# Altium PCB URESP_PULSER2.PcbDoc
Units mil, origin at the board's own origin, x right, y up, seen from the top; angles counter-clockwise.
Board outline 4803.15 x 2283.46 mil, 4 copper layers (Top Layer, GND, POWER, Bottom Layer), stack 23.756 mil thick; 37 components, 55 nets, 205 pads, 11 vias.
Unrouted connection lines stored in the file: 107.
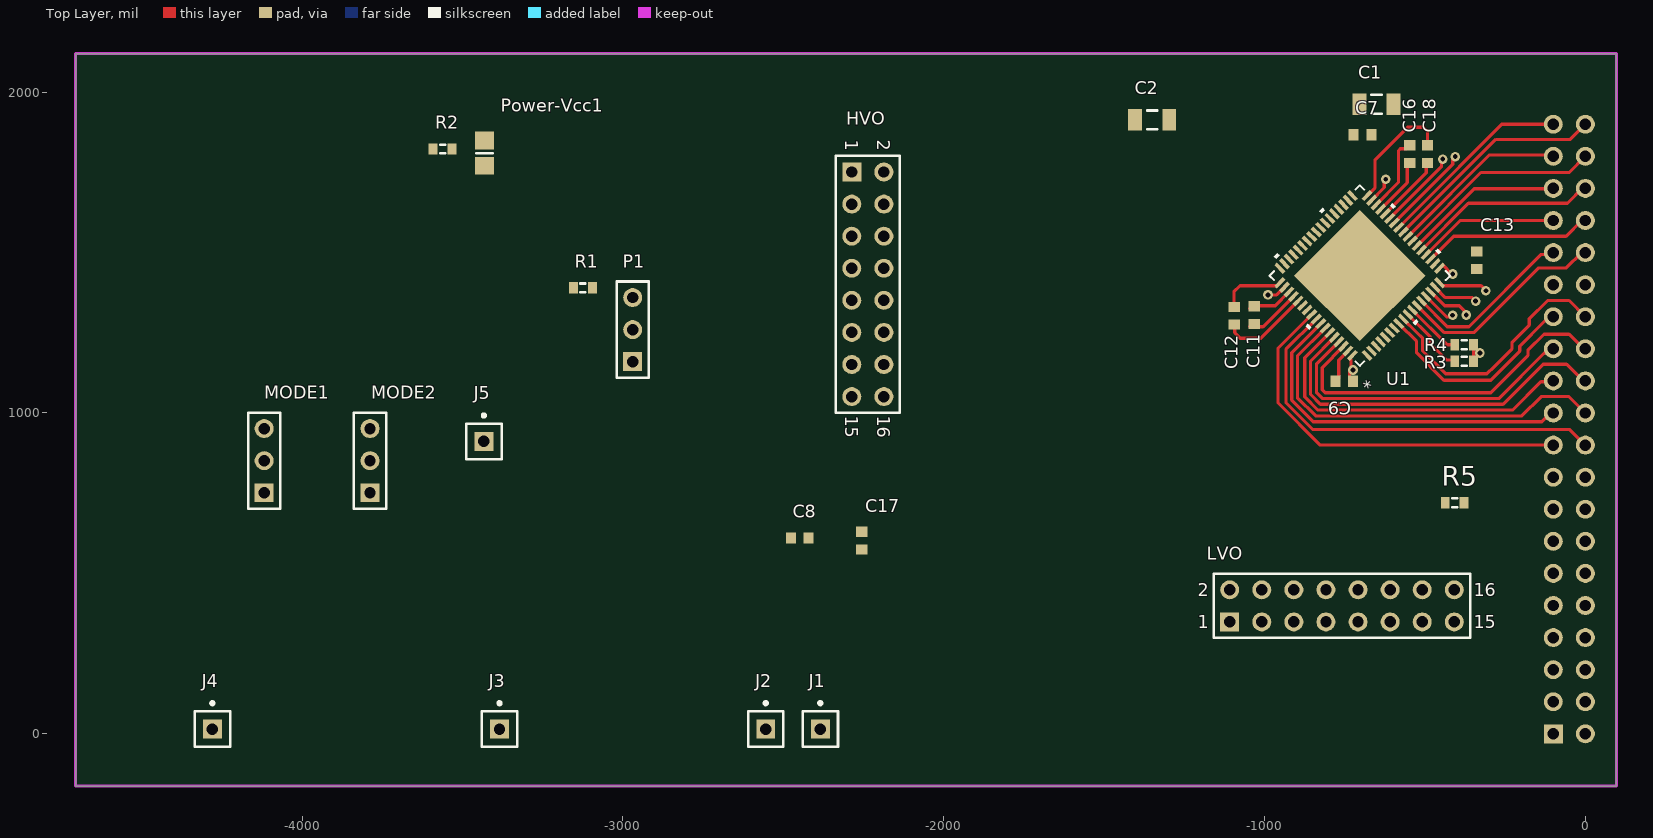
[diagram p0: Top Layer view]
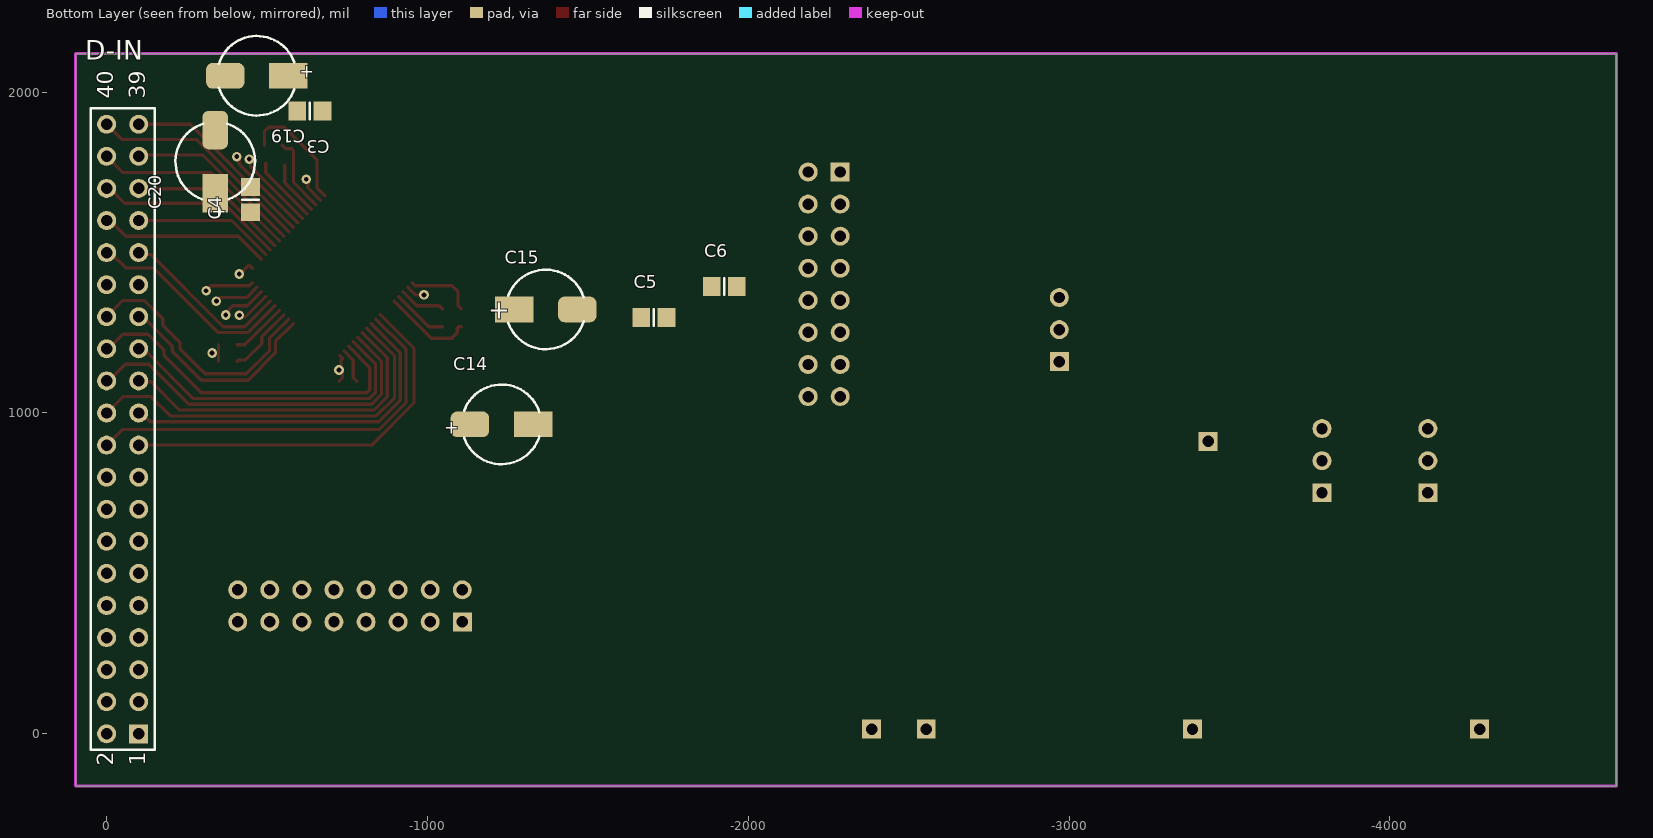
[diagram p1: Bottom Layer view, seen from below]

## Layer stack, top to bottom
Top Solder: solder mask 0.4, Solder Resist, Dk 3.5
Top Layer: signal copper 1.4
Dielectric 2: prepreg 2.8, PP-006, Dk 4.1
GND: signal copper 1.378
Dielectric 1: dielectric 12.6, FR-4, Dk 4.8
POWER: signal copper 1.378
Dielectric 3: prepreg 2.8, PP-006, Dk 4.1
Bottom Layer: signal copper 1.4
Bottom Solder: solder mask 0.4, Solder Resist, Dk 3.5

## Board outline
-4706.3,-162.99 96.85,-162.99 96.85,2120.47 -4706.3,2120.47

## Design rules (kind name [scope] priority, off if disabled: settings)
Clearance [All] p1: gap=10 ignorepadtopadclearanceinfootprint=FALSE except(0: Arc-Hole Track-Hole SMDPad-Hole THPad-Hole Via-Hole Fill-Hole Poly-Hole Region-Hole Text-Hole; 8: Arc-Arc Arc-Track Arc-SMDPad Arc-THPad Arc-Via Arc-Text Track-Track Track-SMDPad Track-THPad Track-Via Track-Text SMDPad-SMDPad SMDPad-THPad SMDPad-Text THPad-Text Via-Text Fill-Text Poly-Text Region-Text Text-Text)
PolygonConnect [All] p1: connectstyle=Relief reliefconductorwidth=10 reliefentries=4 polygonreliefangle="90 Angle" airgapwidth=10
RoutingVias [All] p1: holewidth=28 width=50 viastyle="Through Hole" minholewidth=28 minwidth=50 maxholewidth=28 maxwidth=50
SolderMaskExpansion [All] p1: expansion=4 istentingtop=FALSE
Width [All] p1: maxlimit=10 minlimit=10 preferedwidth=10
30 further rules are at their usual default settings.

## Components (designator, comment, footprint, x,y, rotation, side; value= is the part's Value field where it differs from the comment)
C1 "" C1206 -651.18,1962.99 r0 top value=10uF
C2 "" C1206 -1350.39,1913.39 r0 top value=10uF
C3 "" 6-0805_M -633.86,1940.94 r0 bottom value=100nF
C4 "" 6-0805_M -448.82,1665.35 r90 bottom value=100nF
C5 "" 6-0805_M -1705.71,1297.24 r180 bottom value=100nF
C6 "" 6-0805_M -1925.2,1393.7 r180 bottom value=100nF
C7 "" 1608[0603] -694.88,1867.13 r0 top value=100nF
C8 "" 1608[0603] -2448.82,610.24 r0 top value=100nF
C9 "" 1608[0603] -751.97,1098.43 r180 top value=100nF
C11 "" 1608[0603] -1032.48,1305.12 r270 top value=1uF-10V
C12 "" 1608[0603] -1094.49,1303.15 r270 top value=1uF-10V
C13 "" 1608[0603] -338.58,1476.38 r90 top value=100nF
C14 "" CAPPR5-6.3X5#1 -1230.96,964.57 r180 bottom value=10uF
C15 "" CAPPR5-6.3x5 -1368.76,1322.83 r180 bottom value=10uF
C16 "" 1608[0603] -547.24,1807.09 r270 top value=1uF-10V
C17 "" 1608[0603] -2255.91,602.36 r90 top value=1uF
C18 "" 1608[0603] -492.13,1807.09 r270 top value=1uF-10V
C19 "" CAPPR5-6.3X5#2 -468.5,2051.18 r0 bottom value=10uF
C20 "" CAPPR5-6.3X5#2 -338.58,1783.46 r90 bottom value=10uF
D-IN "" HDR2X20 -100,0 r90 bottom
HVO "" HDR2X8 -2286.61,1751.18 r270 top
J1 "" PIN1 -2384.8,14.76 r0 top
J2 "" PIN1 -2554.8,14.76 r0 top
J3 "" PIN1 -3384.8,14.76 r0 top
J4 "" PIN1 -4279.8,14.76 r0 top
J5 "" PIN1 -3433.39,911.42 r0 top
LVO "" HDR2X8 -1108.66,348.82 r0 top
MODE1 "" HDR1X3 -4118.39,751.42 r90 top
MODE2 "" HDR1X3 -3788.39,751.42 r90 top
P1 "SYNC" HDR1X3 -2969.72,1159.88 r90 top
Power-Vcc1 "LED3" 6-0805_M -3432.09,1810.04 r90 top
R1 "" J1-0603 -3124.72,1389.88 r0 top value=1K
R2 "" J1-0603 -3562.01,1822.83 r0 top value=1K
R3 "" J1-0603 -377.95,1161.42 r180 top value=1K
R4 "" J1-0603 -377.95,1212.6 r180 top value=1K
R5 "" J1-0603 -407.48,720.47 r0 top value=1K
U1 "MAX14808ETK+T" 21-0142E_T6800-2 -703.23,1428.55 r135 top value=Value

## Footprints (in the part's own frame and the unit in brackets; to place one, negate y for a bottom-side part, rotate by r counter-clockwise, add the part's x,y. Pads: shape width x height; smd on the part's side, far side on the other; paste and mask are expansions set on the pad)
6-0805_M [mm] "Chip Resistor, Body 2.0x1.2mm, IPC Low Density"
  rect 1.4x1.5 smd: 1(-1,0) 2(1,0)
  silkscreen extent 0,-0.65 0,0.65, body extent -1.07,-0.7 1.07,0.7, height 0.7
21-0142E_T6800-2 [mil]
  rect 38x12 smd: 1(-192,160) 2(-192,140) 3(-192,120) 4(-192,100) 5(-192,80) 6(-192,60) 7(-192,40) 8(-192,20) 9(-192,0) 10(-192,-20) 11(-192,-40) 12(-192,-60) 13(-192,-80) 14(-192,-100) 15(-192,-120) 16(-192,-140) 17(-192,-160) 35(192,-160) 36(192,-140) 37(192,-120) 38(192,-100) 39(192,-80) 40(192,-60) 41(192,-40) 42(192,-20) 43(192,0) 44(192,20) 45(192,40) 46(192,60) 47(192,80) 48(192,100) 49(192,120) 50(192,140) 51(192,160)
  rect 12x38 smd: 18(-160,-192) 19(-140,-192) 20(-120,-192) 21(-100,-192) 22(-80,-192) 23(-60,-192) 24(-40,-192) 25(-20,-192) 26(0,-192) 27(20,-192) 28(40,-192) 29(60,-192) 30(80,-192) 31(100,-192) 32(120,-192) 33(140,-192) 34(160,-192) 52(160,192) 53(140,192) 54(120,192) 55(100,192) 56(80,192) 57(60,192) 58(40,192) 59(20,192) 60(0,192) 61(-20,192) 62(-40,192) 63(-60,192) 64(-80,192) 65(-100,192) 66(-120,192) 67(-140,192) 68(-160,192)
  rect 290x290 smd paste-153: 69(0,0)
  silkscreen extent -231,-231 231,231
1608[0603] [mm] "Chip Capacitor, Body 1.6x0.8mm, IPC High Density"
  rect 0.8x0.9 smd: 1(-0.7,0) 2(0.7,0)
  body extent -0.87,-0.48 0.87,0.48, height 1.3
C1206 [mm] "Chip Capacitor, Body 3.2x1.6mm, IPC High Density"
  rect 1.1x1.7 smd: 1(-1.35,0) 2(1.35,0)
  silkscreen extent -0.4,-0.75 0.4,0.75, body extent -1.7,-0.9 1.7,0.9, height 1.3
CAPPR5-6.3X5#1 [mil] "Capacitor, Electrolytic, Radial; Body 6.3 x 5 mm (Dia.xH typ); Pin Spacing 5 mm (typ)"
  rrect50% 120x80 smd: 1(-98.43,0)
  rect 120x80 smd: 2(98.43,0)
  silkscreen extent -117,-124 118,124
CAPPR5-6.3X5#2 [mil] "Capacitor, Electrolytic, Radial; Body 6.3 x 5 mm (Dia.xH typ); Pin Spacing 5 mm (typ)"
  rect 120x80 smd: 1(-98.43,0)
  rrect50% 120x80 smd: 2(98.43,0)
  silkscreen extent -117,-124 118,124
CAPPR5-6.3x5 [mil] "Capacitor, Electrolytic, Radial; Body 6.3 x 5 mm (Dia.xH typ); Pin Spacing 5 mm (typ)"
  rect 120x80 smd: 1(-98.43,0)
  rrect50% 120x80 smd: 2(98.43,0)
  silkscreen extent -117,-124 118,124
HDR1X3 [mm] "Connector; Header; 3 Position"
  rect 1.5x1.5 hole 0.9: 1(0,0)
  round 1.5 hole 0.9: 2(2.54,0) 3(5.08,0)
  silkscreen extent -1.27,-1.27 6.35,1.27
HDR2X8 [mm] "Connector; Header; 8x2 Position"
  rect 1.5x1.5 hole 0.9: 1(0,0)
  round 1.5 hole 0.9: 2(0,2.54) 3(2.54,0) 4(2.54,2.54) 5(5.08,0) 6(5.08,2.54) 7(7.62,0) 8(7.62,2.54) 9(10.16,0) 10(10.16,2.54) 11(12.7,0) 12(12.7,2.54) 13(15.24,0) 14(15.24,2.54) 15(17.78,0) 16(17.78,2.54)
  silkscreen extent -1.27,-1.27 19.05,3.81
HDR2X20 [mm] "Connector; Header; 20x2 Position"
  rect 1.5x1.5 hole 0.9: 1(0,0)
  round 1.5 hole 0.9: 2(0,2.54) 3(2.54,0) 4(2.54,2.54) 5(5.08,0) 6(5.08,2.54) 7(7.62,0) 8(7.62,2.54) 9(10.16,0) 10(10.16,2.54) 11(12.7,0) 12(12.7,2.54) 13(15.24,0) 14(15.24,2.54) 15(17.78,0) 16(17.78,2.54) 17(20.32,0) 18(20.32,2.54) 19(22.86,0) 20(22.86,2.54) 21(25.4,0) 22(25.4,2.54) 23(27.94,0) 24(27.94,2.54) 25(30.48,0) 26(30.48,2.54) 27(33.02,0) 28(33.02,2.54) 29(35.56,0) 30(35.56,2.54) 31(38.1,0) 32(38.1,2.54) 33(40.64,0) 34(40.64,2.54) 35(43.18,0) 36(43.18,2.54) 37(45.72,0) 38(45.72,2.54) 39(48.26,0) 40(48.26,2.54)
  silkscreen extent -1.27,-1.27 49.53,3.81
J1-0603 [mm] "Chip Resistor, Body 1.6x0.8mm, IPC High Density"
  rect 0.7x0.9 smd: 1(-0.75,0) 2(0.75,0)
  silkscreen extent -0.2,-0.35 0.2,0.35, body extent -0.85,-0.48 0.85,0.48, height 0.9
PIN1 [mm] "Connector; Plug"
  rect 1.5x1.5 hole 0.9: 1(0,0)
  silkscreen extent -1.4,-1.4 1.4,2.17

## Part data
C1 C2: library part "Cap Pol3", "Polarized Capacitor (Surface Mount)", LatestRevisionDate=29-May-2009, LatestRevisionNote="IPC-7351 Footprint Added.", PackageDescription="Chip Capacitor", PackageReference=C0805, Published=8-Jun-2000, Publisher="Altium Limited"
C3 C4 C5 C6 C7 C8 C9 C11 C12 C13 C14 C15 C16 C17 C18 C19 C20: library part "Cap Semi", "Capacitor (Semiconductor SIM Model)", LatestRevisionDate=29-May-2009, LatestRevisionNote="IPC-7351 Footprint Added.", PackageDescription="Chip Capacitor", PackageReference=C1206, Published=8-Jun-2000, Publisher="Altium Limited"
D-IN: library part "Header 20X2", "Header, 20-Pin, Dual row", LatestRevisionDate=17-Jul-2002, LatestRevisionNote="Re-released for DXP Platform.", Publisher="Altium Limited"
HVO LVO: library part "Header 8X2H", "Header, 8-Pin, Dual row, Right Angle", LatestRevisionDate=17-Jul-2002, LatestRevisionNote="Re-released for DXP Platform.", Publisher="Altium Limited"
J1 J2 J3 J4 J5: library part Socket, "Socket", LatestRevisionDate=17-Jul-2002, LatestRevisionNote="Re-released for DXP Platform.", Publisher="Altium Limited"
MODE1 MODE2 P1: library part "Header 3", "Header, 3-Pin", LatestRevisionDate=17-Jul-2002, LatestRevisionNote="Re-released for DXP Platform.", Publisher="Altium Limited"
Power-Vcc1: "Typical BLUE SiC LED", DatasheetVersion=16-Apr-2002, LatestRevisionDate=17-Dec-2003, LatestRevisionNote="PCB Footprint replaced.", PackageDescription="SM LED; 2 C-Bend Leads; Body 3.5 x 2.8 x 1.9 mm, inc leads (LxWxH typ)", PackageReference=3.5X2.8X1.9, PackageVersion=16-Apr-2002, Published=8-Jun-2000, Publisher="Altium Limited"
R1 R2 R3 R4 R5: library part Res3, "Resistor", LatestRevisionDate=29-May-2009, LatestRevisionNote="IPC-7351 Footprint Added.", PackageDescription="Chip Resistor", PackageReference=J1-0603, Published=8-Jun-2000, Publisher="Altium Limited"
U1: "Imported", Manufacturer_Name=Maxim, Manufacturer_Part_Number=MAX14808ETK+T, RefDes=RefDes, Type=DEV, Vendor=Maxim

## Via types
v1: diameter 30, hole 15, Top Layer to Bottom Layer, tented both sides, 11 vias

## Nets (pads, with @x,y where several pads share a name; then routed paths per layer and width w, separated by ;. In a path a pad name is that pad's centre, name@x,y a point inside that pad or via, vN(x,y) a via of type N, cw(c..) or ccw(c..) an arc to the next point about the centre after c; other vN are vias at no path point)
+HVA: C5.2 C11.1 C14.1 J4.1 U1.46 U1.50 U1.54 | length 145.7
  Top Layer w10: C11.1@-1047.24,1323.82 -1036.5,1334.57 -966.92,1334.57 U1.54
+HVB: C3.2 C16.1 C19.1 J2.1 U1.32 U1.36 U1.40 | length 240
  Top Layer w10: U1.32 -582.68,1718.81 -582.68,1818.04 -576.82,1823.9 -557.99,1823.9 C16.1
-HVA: C6.2 C12.1 C15.2 J5.1 U1.44 U1.48 U1.52 | length 213.6
  Top Layer w10: C12.1@-1106.3,1323.82 -1106.22,1323.82 -1095.47,1334.57 -1095.47,1377.95 -1076.69,1396.73 -961.33,1396.73 U1.52
-HVB: C4.2 C18.1 C20.2 J3.1 U1.34 U1.38 U1.42 | length 376.3
  Top Layer w10: U1.34 -655.51,1702.55 -655.51,1789.37 -554.13,1890.75 -504.92,1890.75 -492.13,1877.95 C18.1
CLK: D-IN.27 U1.8 | length 666.7
  Top Layer w10: U1.8 -526.06,1223.1 -526.06,1187.28 -441.14,1102.36 -295.28,1102.36 -204.72,1192.91 -204.72,1208.66 -128.18,1285.21 -128.07,1285.21 -113.27,1300 D-IN.27
DN1: D-IN.25 U1.65 | length 997.1
  Top Layer w10: U1.65 -838.47,1151.89 -838.47,1094.18 -838.47,1064.99 -818.48,1044.99 -789.28,1044.99 -269.97,1044.99 -128.97,1185.99 -127.28,1185.99 -113.27,1200 D-IN.25
DN2: D-IN.23 U1.63 | length 1061.7
  Top Layer w10: U1.63 -874.47,1172.46 -874.47,1079.27 -874.47,1050.07 -833.39,1008.99 -804.19,1008.99 -227.23,1008.99 -138.67,1097.55 -102.45,1097.55 D-IN.23
DN3: D-IN.21 U1.61 | length 1130.5
  Top Layer w10: U1.61 -915.53,1187.97 -915.53,1040.22 -848.3,972.99 -135.96,972.99 -108.96,1000 D-IN.21
DN4: D-IN.19 U1.59 | length 1231.4
  Top Layer w10: U1.59 -958.27,1201.8 -958.27,1032.05 -826.22,900 D-IN.19
DN5: D-IN.33 U1.21 | length 440.8
  Top Layer w10: U1.21 -390.36,1600 D-IN.33
DN6: D-IN.35 U1.23 | length 498.8
  Top Layer w10: U1.23 -523.63,1521.89 -346.31,1699.21 -100.79,1699.21 D-IN.35
DN7: D-IN.37 U1.25 | length 560.6
  Top Layer w10: U1.25 -534.79,1568.71 -298.97,1804.53 -104.53,1804.53 D-IN.37
DN8: D-IN.39 U1.27 | length 615
  Top Layer w10: U1.27 -563.07,1597 -528.15,1631.92 -528.15,1632.28 -260.43,1900 D-IN.39
DP1: D-IN.26 U1.66 | length 1091.3
  Top Layer w10: U1.66 -820.47,1141.61 -820.47,1072.44 -811.02,1062.99 -295.28,1062.99 -179.25,1179.02 -179.25,1195.3 -129.07,1245.47 -50.79,1245.47 -5.31,1200 D-IN.26
DP2: D-IN.24 U1.64 | length 1151.8
  Top Layer w10: U1.64 -856.47,1162.18 -856.47,1086.73 -856.47,1057.53 -825.94,1026.99 -796.74,1026.99 -256.47,1026.99 -131.5,1151.97 -58.66,1151.97 -6.69,1100 D-IN.24
DP3: D-IN.22 U1.62 | length 1219.9
  Top Layer w10: U1.62 -897.53,1177.69 -897.53,1047.67 -840.85,990.99 -197.98,990.99 -137.8,1051.18 -51.18,1051.18 D-IN.22
DP4: D-IN.20 U1.60 | length 1287.7
  Top Layer w10: U1.60 -933.53,1198.26 -933.53,1032.76 -848.99,948.23 -48.23,948.23 D-IN.20
DP5: D-IN.34 U1.20 | length 532.5
  Top Layer w10: U1.20 -410.9,1551.18 -60.04,1551.18 -11.22,1600 D-IN.34
DP6: D-IN.36 U1.22 | length 590.6
  Top Layer w10: U1.22 U1.22 -364.76,1653.94 -55.71,1653.94 -9.65,1700 D-IN.36
DP7: D-IN.38 U1.24 | length 648.5
  Top Layer w10: U1.24 -526.51,1548.71 -325.6,1749.62 -50.38,1749.62 D-IN.38
DP8: D-IN.40 U1.26 | length 706.5
  Top Layer w10: U1.26 -535.97,1595.81 -279.03,1852.76 -47.24,1852.76 D-IN.40
FPGA_3.3v: D-IN.30
GND: C1.2 C2.2 C3.1 C4.1 C5.1 C6.1 C7.1 C8.1 C9.1 C13.1 C14.2 C15.1 C17.1 C19.2 C20.1 D-IN.29 HVO.1 HVO.3 HVO.5 HVO.7 HVO.9 HVO.11 HVO.13 HVO.15 J1.1 LVO.3 LVO.5 LVO.7 LVO.9 LVO.11 LVO.13 MODE1.1 MODE2.1 P1.1 Power-Vcc1.2 R3.1 R4.1 U1.18 U1.33 U1.43 U1.53 U1.68 U1.69 | length 371.9
  Top Layer w10: v1@-993.11,1368.11 -962.4,1368.11 -938.73,1391.78 U1.53 ; v1@-735.05,1133.86 -735.05,1109.07 C9.1 ; U1.68 -735.05,1170.46 -735.05,1169.05 -730.31,1164.31 -730.31,1145.18 -724.41,1139.27 v1(-724.41,1133.86) ; U1.33 -626.97,1702.81 -626.97,1723.43 v1(-622.05,1728.35) ; U1.18 -445.14,1460.37 -443.72,1460.37 -416.42,1433.07 v1(-413.39,1433.07) ; R3.1 -348.43,1187.01 ; R4.1 -348.43,1187.01 ; v1@-326.77,1188.98 v1(-328.74,1187.01) -348.43,1187.01
  other v1: -989.17,1368.11
LVOUT-1: LVO.2 U1.1
LVOUT-2: LVO.4 U1.2
LVOUT-3: LVO.6 U1.3
LVOUT-4: LVO.8 U1.4
LVOUT-5: LVO.10 U1.14 | length 100.4
  Top Layer w10: U1.14 -432.86,1299.61 v1@-422.83,1299.61
  other v1: -413.98,1304.53
LVOUT-6: LVO.12 U1.15 | length 142.7
  Top Layer w10: U1.15 -439.03,1334.06 -393.31,1334.06 -374.61,1315.35 v1@-374.61,1306.5
  other v1: -371.65,1305.51
LVOUT-7: LVO.14 U1.16 | length 144.1
  Top Layer w10: U1.16 -436.33,1359.65 -352.95,1359.65 v1(-342.13,1348.82)
LVOUT-8: LVO.16 U1.17 | length 154.9
  Top Layer w10: U1.17 -445.14,1396.73 -325.08,1396.73 v1@-309.65,1381.3
  other v1: -310.11,1380.87
MODE0: D-IN.32 MODE1.2 U1.12 | length 663
  Top Layer w10: U1.12 -440.92,1251.09 -346.35,1251.09 -145.28,1452.17 -59.65,1452.17 -11.81,1500 D-IN.32
MODE1: D-IN.31 MODE2.2 U1.13 | length 539.8
  Top Layer w10: U1.13 -430.64,1269.09 -362.8,1269.09 -137.43,1494.46 -105.54,1494.46 D-IN.31
NCLK: D-IN.28 U1.9 | length 799.6
  Top Layer w10: U1.9 -527.12,1252.44 -507.42,1232.74 -507.42,1194.23 -506.52,1193.33 -435.24,1122.05 -307.09,1122.05 -284.45,1144.69 -228.35,1200.79 -228.35,1220.47 -174.9,1273.92 -174.9,1293.6 -117.72,1350.79 -50.79,1350.79 D-IN.28
NetC11_2: C11.2 U1.55 | length 176.8
  Top Layer w10: C11.2@-1047.24,1268.7 -1004.51,1268.7 U1.55
NetC12_2: C12.2 U1.56 | length 281.8
  Top Layer w10: C12.2@-1106.3,1268.7 -1097.08,1268.7 -1093.22,1264.84 -1093.22,1250.7 -1075.79,1233.27 -1011.66,1233.27 -958.66,1286.26 U1.56
NetC16_2: C16.2 U1.31 | length 172.4
  Top Layer w10: U1.31 -555.12,1718.09 C16.2@-555.12,1773.02
NetC18_2: C18.2 U1.30 | length 211.6
  Top Layer w10: U1.30 -506.73,1738.19 -496.06,1748.86 C18.2@-496.06,1779.53
NetP1_2: P1.2 U1.7
NetPower-Vcc1_1: Power-Vcc1.1 R2.1
NetR1_2: R1.2 U1.6
NetR3_2: R3.2 U1.10 | length 218.6
  Top Layer w10: U1.10 -483.43,1237.04 -483.43,1215.72 -433.07,1165.35 -411.42,1165.35 R3.2
NetR4_2: R4.2 U1.11 | length 176.6
  Top Layer w10: U1.11 -430.71,1212.6 R4.2
NetR5_2: R5.2 U1.5
OUT-1: HVO.16 U1.51
OUT-2: HVO.14 U1.49
OUT-3: HVO.12 U1.47
OUT-4: HVO.10 U1.45
OUT-5: HVO.8 U1.41
OUT-6: HVO.6 U1.39
OUT-7: HVO.4 U1.37
OUT-8: HVO.2 U1.35
VCC: C2.1 C8.2 C17.2 LVO.1 R2.2 U1.28 U1.58 | length 285.4
  Top Layer w10: U1.28 -413.39,1774.97 -413.39,1791.34 v1(-405.51,1799.21)
VDD: C1.1 C7.2 C9.2 C13.2 LVO.15 MODE1.3 MODE2.3 P1.3 R1.1 R5.1 U1.19 U1.67 | length 111.7
  Top Layer w10: C9.2 -768.78,1109.17 -768.78,1165.02 U1.67
VEE: U1.29 U1.57 | length 252.5
  Top Layer w10: U1.29 -609.79,1606.74 -448.71,1767.83 v1@-448.71,1792.46
  other v1: -444.88,1791.34
pads on no net: D-IN.1 D-IN.2 D-IN.3 D-IN.4 D-IN.5 D-IN.6 D-IN.7 D-IN.8 D-IN.9 D-IN.10 D-IN.11 D-IN.12 D-IN.13 D-IN.14 D-IN.15 D-IN.16 D-IN.17 D-IN.18

## Keep-outs
Keep-Out Layer:
  the board outline again, w10

## Text inside footprints (layer, text, board x,y; h text height)
C14: Bottom Overlay "+" at -1051.83,935.04 h40
C15: Bottom Overlay "+" at -1189.62,1293.31 h59.06
C19: Bottom Overlay "+" at -647.64,2080.71 h40 r180
C20: Bottom Overlay "+" at -368.11,1604.33 h40 r270
D-IN: Bottom Overlay "1" at -120,-100 h50 r270; Bottom Overlay "2" at -20,-100 h50 r270; Bottom Overlay "40" at -20,1980 h50 r270; Bottom Overlay "39" at -120,1980 h50 r270
HVO: Top Overlay "2" at -2206.61,1851.18 h40 r270; Top Overlay "1" at -2306.61,1851.18 h40 r270; Top Overlay "15" at -2306.61,991.18 h40 r270; Top Overlay "16" at -2206.61,991.18 h40 r270
LVO: Top Overlay "2" at -1208.66,428.82 h40; Top Overlay "1" at -1208.66,328.82 h40; Top Overlay "15" at -348.66,328.82 h40; Top Overlay "16" at -348.66,428.82 h40
U1: Top Overlay "*" at -649.61,1098.43 h40 r135